# Altium PCB PCB_Hall_Sensor.PcbDoc
Units mil, origin at the board's own origin, x right, y up, seen from the top; angles counter-clockwise.
Board outline 2745 x 2360 mil, 2 copper layers (Top Layer, Bottom Layer); 47 components, 43 nets, 139 pads, 4 vias.
Unrouted connection lines stored in the file: 4.
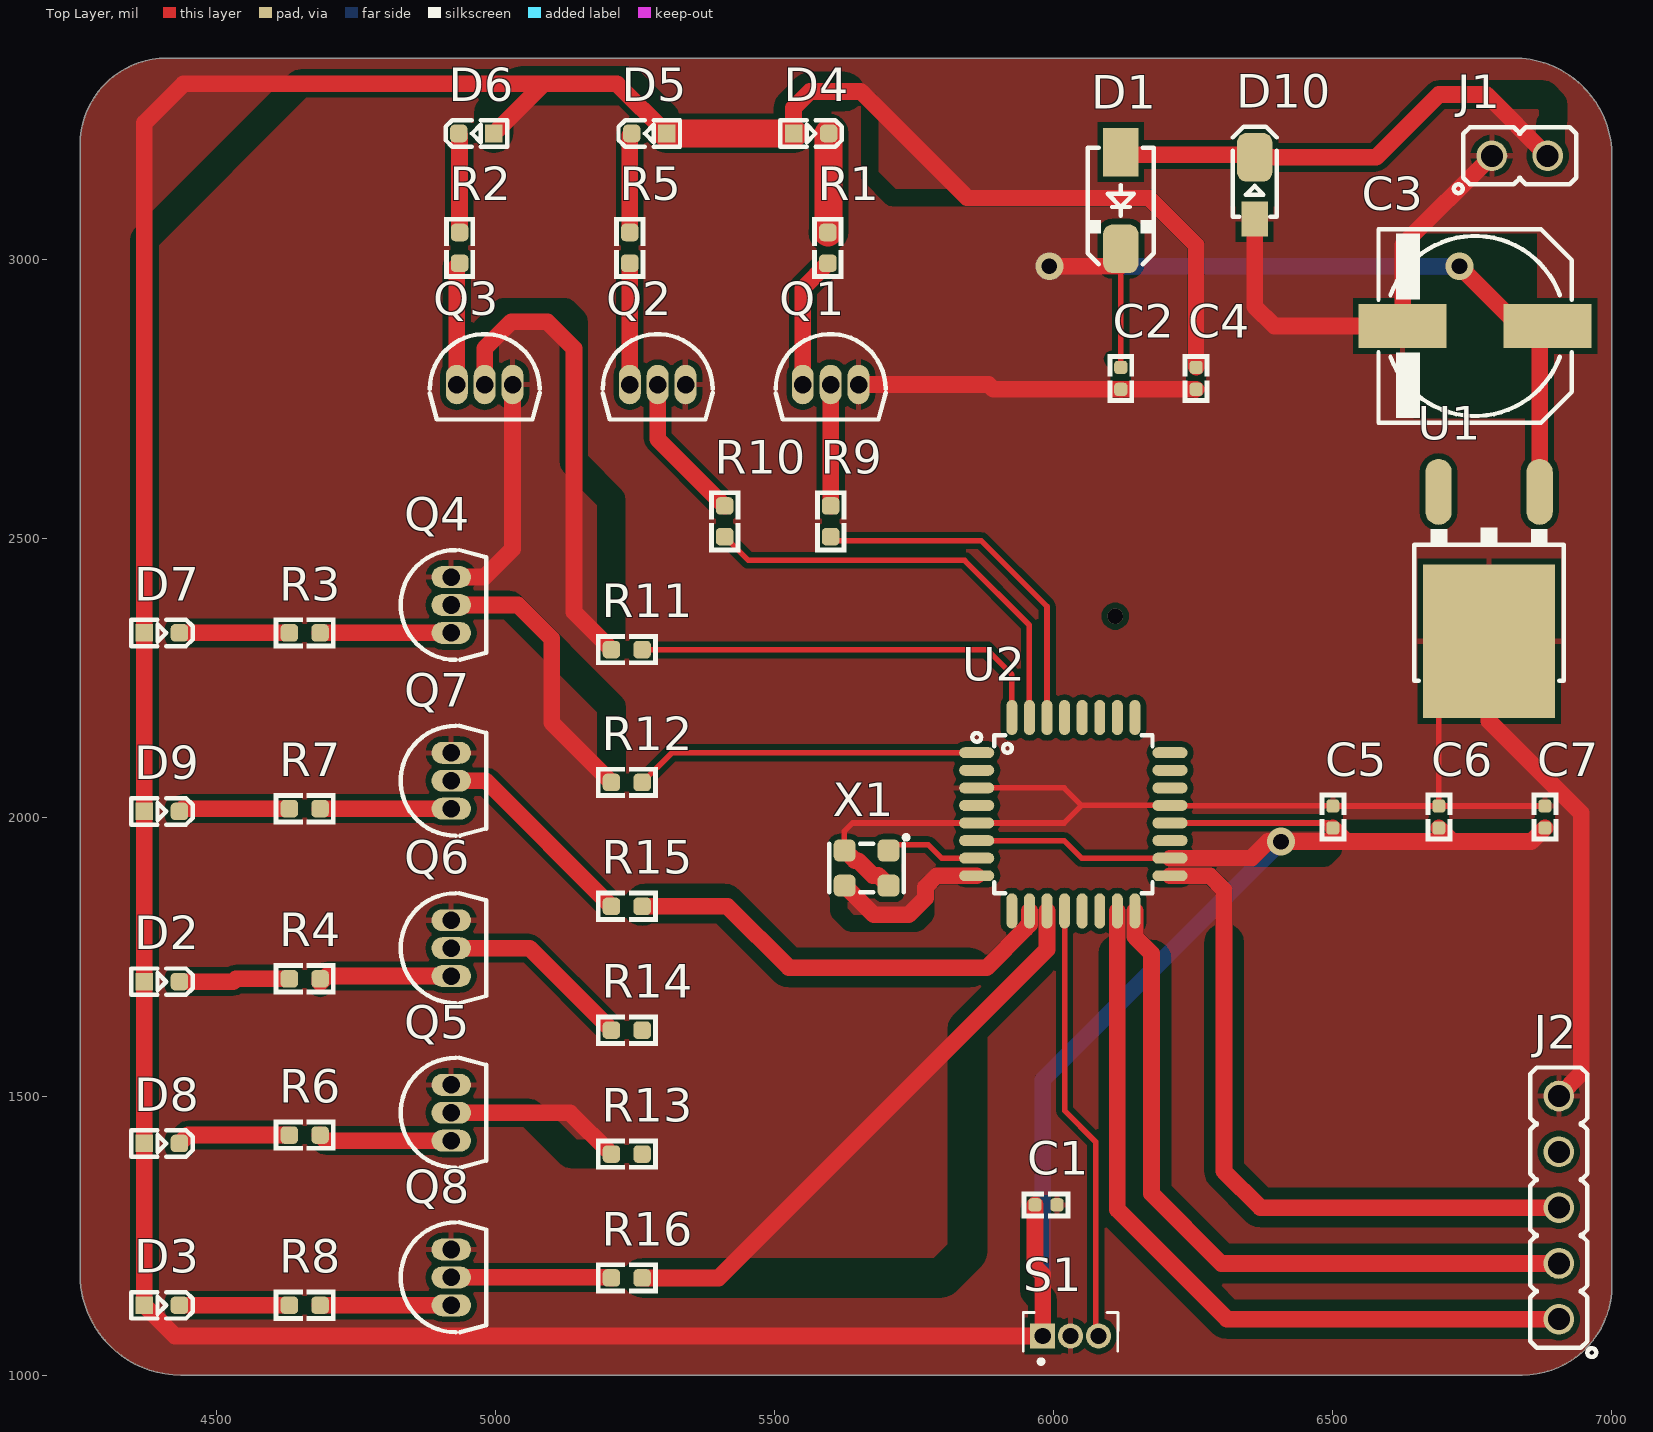
[diagram p0: Top Layer view]
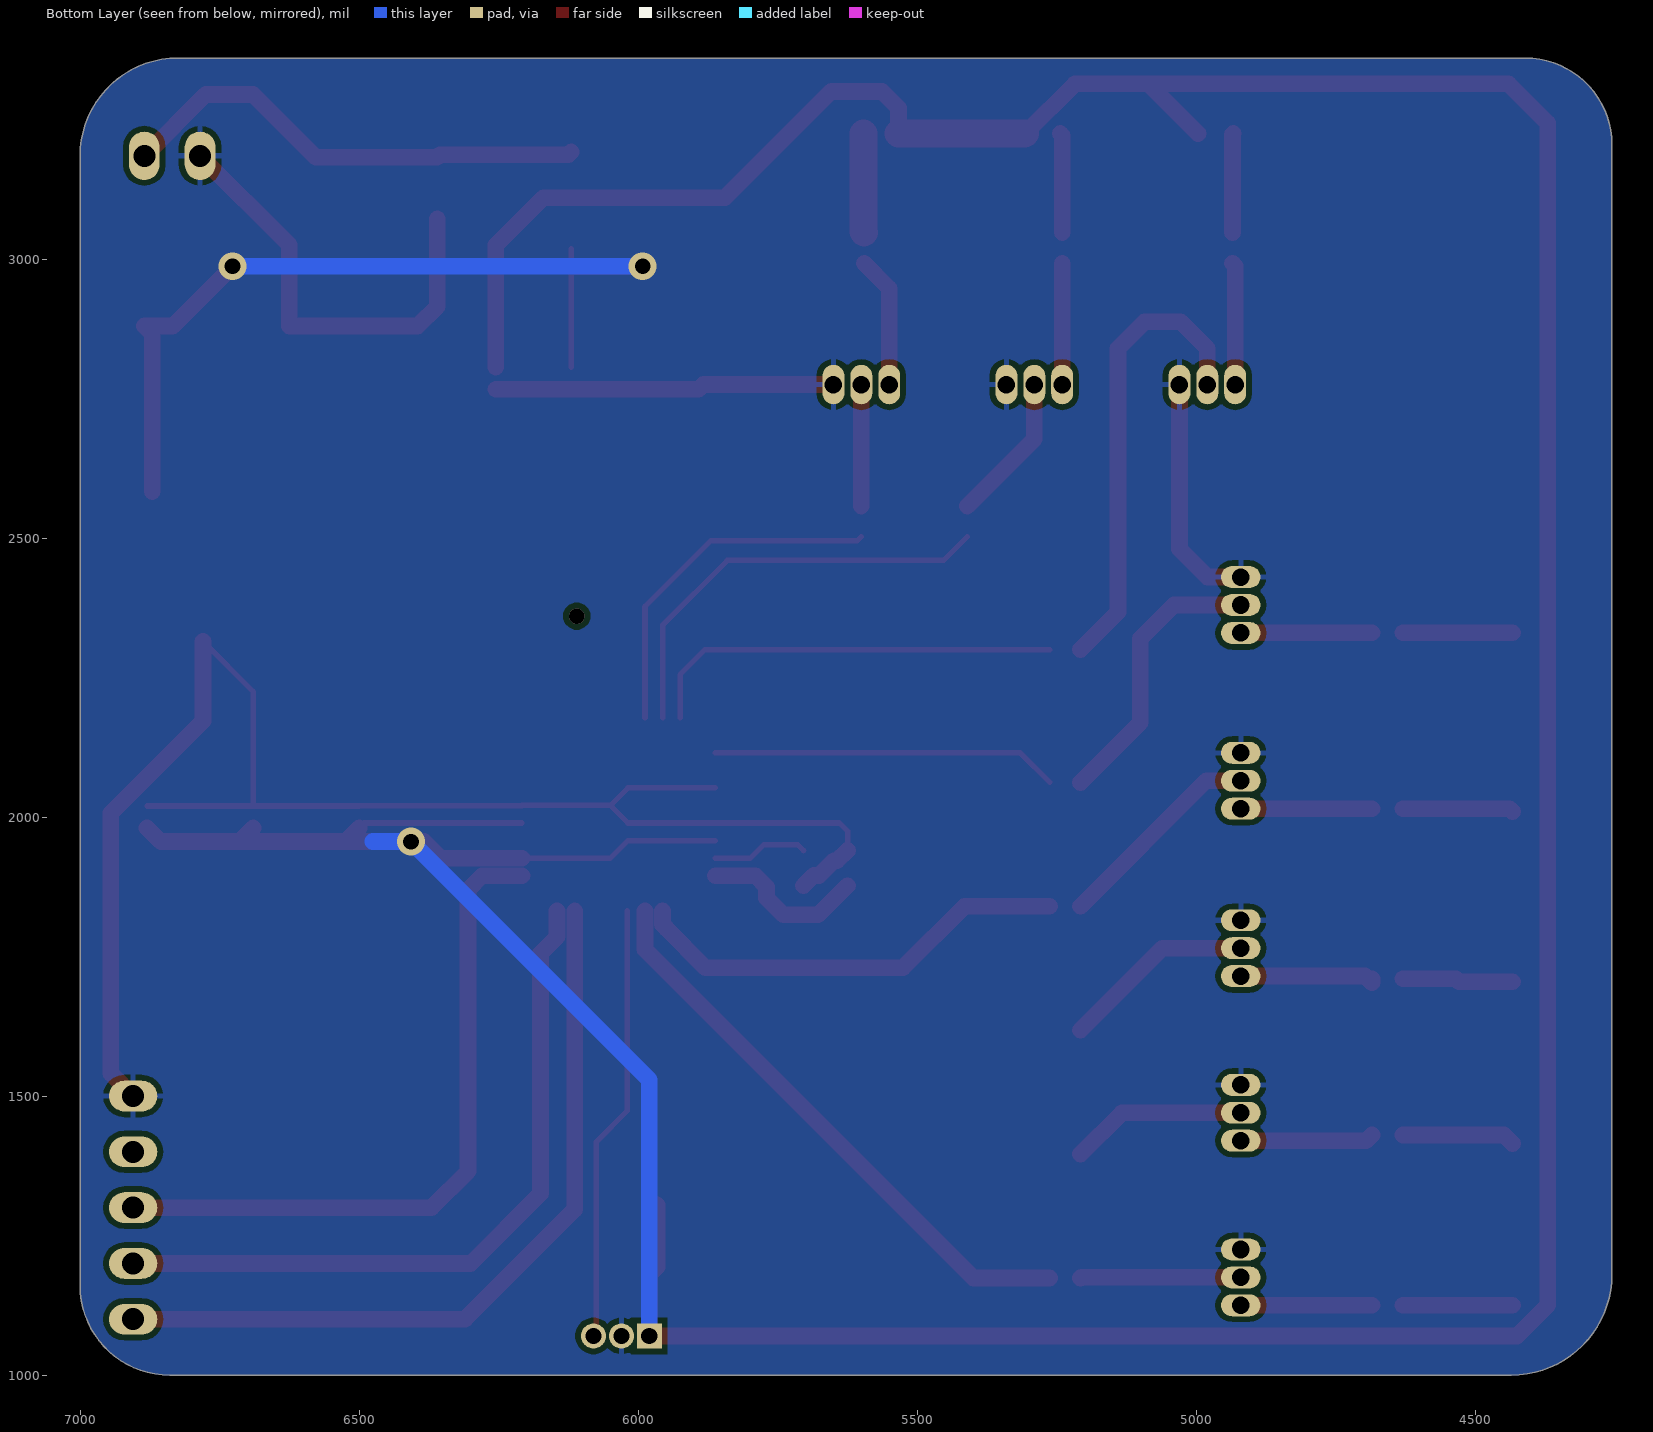
[diagram p1: Bottom Layer view, seen from below]

## Layer stack, top to bottom
Top Solder: solder mask 0.4, Solder Resist, Dk 3.5
Top Layer: signal copper 1.4
Dielectric 1: dielectric 12.6, FR-4, Dk 4.8
Bottom Layer: signal copper 1.4
Bottom Solder: solder mask 0.4, Solder Resist, Dk 3.5

## Board outline
4435,1000 6839.82,1000 ccw(c6840,1160) 7000,1160 7000,3184.74 ccw(c6825,3185) 6825,3360 4410,3360 ccw(c4410,3205) 4255,3205 4255,1180 ccw(c4435,1180)

## Design rules (kind name [scope] priority, off if disabled: settings)
Clearance [All] p1: gap=10 ignorepadtopadclearanceinfootprint=FALSE except(0: Arc-Hole Track-Hole SMDPad-Hole THPad-Hole Via-Hole Fill-Hole Poly-Hole Region-Hole Text-Hole)
PolygonConnect [All] p1: connectstyle=Relief reliefconductorwidth=10 reliefentries=4 polygonreliefangle="90 Angle" airgapwidth=10
RoutingVias [All] p1: holewidth=28 width=50 viastyle="Through Hole" minholewidth=28 minwidth=50 maxholewidth=28 maxwidth=50
SolderMaskExpansion [All] p1: expansion=4 istentingtop=FALSE
Width [All] p1: maxlimit=50 minlimit=10 preferedwidth=30 minimp=50.000000 maximp=50.000000 favimp=50.000000
30 further rules are at their usual default settings.

## Components (designator, comment, footprint, x,y, rotation, side; value= is the part's Value field where it differs from the comment)
C1 "1nF" C0402 5986,1305 r0 top
C2 "1nF" C0402 6120,2786.14 r270 top
C3 "100uF" C_EL_8 6755,2880 r180 top
C4 "1nF" C0402 6255,2786.14 r270 top
C5 "1nF" C0402 6500,2000 r90 top
C6 "1nF" C0402 6690,2000 r90 top
C7 "1nF" C0402 6880,2000 r90 top
D1 "1N4007" D_SMA 6120,3105 r270 top
D2 "LED603RED" LED0603RED 4401.5,1705 r0 top
D3 "LED603RED" LED0603RED 4401.5,1125 r0 top
D4 "LED603RED" LED0603RED 5565,3225 r0 top
D5 "LED603RED" LED0603RED 5275,3225 r180 top
D6 "LED603RED" LED0603RED 4965,3225 r180 top
D7 "LED603RED" LED0603RED 4401.5,2330 r0 top
D8 "LED603RED" LED0603RED 4401.5,1415 r0 top
D9 "LED603RED" LED0603RED 4401.5,2010 r0 top
D10 "ZENER5V6" D_SOD123W 6360,3135 r90 top
J1 "HDRM2" HDR_M_1X2 6835,3185 r0 top
J2 "HDR1X5" HDR_M_1X5 6905,1300 r90 top value=HDRM5
Q1 "BC548" TO92_3 5600,2775 r0 top
Q2 "BC548" TO92_3 5290,2775 r0 top
Q3 "BC548" TO92_3 4980,2775 r0 top
Q4 "BC548" TO92_3 4920,2380 r90 top
Q5 "BC548" TO92_3 4920,1470 r90 top
Q6 "BC548" TO92_3 4920,1765 r90 top
Q7 "BC548" TO92_3 4920,2065 r90 top
Q8 "BC548" TO92_3 4920,1175 r90 top
R1 "10K" R0603 5595,3020 r90 top
R2 "10K" R0603 4935,3020 r90 top
R3 "10K" R0603 4657.44,2330 r180 top
R4 "10K" R0603 4657.44,1710 r180 top
R5 "10K" R0603 5240,3020 r90 top
R6 "10K" R0603 4657.44,1430 r180 top
R7 "10K" R0603 4657.44,2015 r180 top
R8 "10K" R0603 4657.44,1125 r180 top
R9 "330" R0603 5600,2530 r90 top
R10 "10K" R0603 5410,2530 r90 top
R11 "10K" R0603 5234.69,2300 r180 top
R12 "10K" R0603 5234.69,2062 r180 top
R13 "10K" R0603 5234.69,1396 r180 top
R14 "10K" R0603 5234.69,1618 r180 top
R15 "10K" R0603 5234.69,1840 r180 top
R16 "10K" R0603 5234.69,1174 r180 top
S1 "AH3582-P-B" SIP160W38P127L430H495Q3 5980,1070 r90 top
U1 "L78M05CDT" DPAK_3 6780,2582.72 r180 top
U2 "ATMEGA8" QFG80_32 6035,2005 r0 top
X1 "16MHz" XTL_4_2520 5664.37,1908.5 r270 top

## Footprints (in the part's own frame and the unit in brackets; to place one, negate y for a bottom-side part, rotate by r counter-clockwise, add the part's x,y. Pads: shape width x height; smd on the part's side, far side on the other; paste and mask are expansions set on the pad)
C0402 [mm] "CHIP Capacitor, 1.0X0.5mm, 0402"
  rrect50% 0.6x0.6 smd paste-0.05 mask+0.075: 1(-0.5,0) 2(0.5,0)
  silkscreen extent -1.1,-0.6 1.1,0.6, body extent -0.5,-0.26 0.5,0.27, height 0.36
C_EL_8 [mm] "Electrolytic Cap, Size E, Size F, 8.3X10"
  rect 4x2 smd: 1(-3.3,0) 2(3.3,0)
  Top Layer pour cut-out: 2.794,4.191 2.794,-4.191 -2.794,-4.191 -2.794,4.191
  silkscreen extent -4.4,-4.4 4.4,4.4, body extent -4.9,-4.25 4.8,4.25, height 10.3
D_SMA [mm] "SMA Molded Diode, 2-Leads, Body 4.3x2.7mm, SOD-128"
  rect 2.2x1.6 smd paste-0.1: 1(-2.2,0)
  rrect50% 2.2x1.6 smd paste-0.1: 2(2.2,0)
  silkscreen extent -2.4,-1.5 2.9,1.5, body extent -2.75,-1.4 2.75,1.4, height 2.6
D_SOD123W [mm] "PowerDI-123, SOD123, DO-213AA, 1206D"
  rect 1.6x1.2 smd paste-0.1 mask+0.1: 1(-1.6,0)
  rrect50% 2.2x1.6 smd paste-0.1 mask+0.1: 2(1.2,0)
  Top Layer pour cut-out: -1.016,1.1 -1.016,-1.1 1.016,-1.1 1.016,1.1
  silkscreen extent -1.5,-1 2.6,1, body extent -1.95,-0.97 1.95,0.96, height 1
DPAK_3 [mm] "D-PAK (TO-252), 3-Pads, Body 6.2x6.7mm"
  oval 1.2x3 smd: 1(-2.3,0) 3(2.3,0)
  rect 6x7 smd paste-5: 4(0,6.8)
  silkscreen extent -3.4,1.63 3.4,8.6, body extent -3.37,-0.5 3.37,9.6, height 2.37
HDR_M_1X2 [mm] "Connector; Header; 2 Position"
  round 1.4 / inner round 1.4 / far side oval 1.4x2.2 hole 1 mask+0.1: 1(-1.27,0) 2(1.27,0)
  silkscreen extent -3,-1.7 2.57,1.3, body extent -2.54,-1.25 2.44,1.25, height 8.72
HDR_M_1X5 [mm] "Connector; Header; 5 Position"
  round 1.4 / inner round 1.4 / far side oval 1.4x2.2 hole 1 mask+0.1: 1(-5.08,0) 2(-2.54,0) 3(0,0) 4(2.54,0) 5(5.08,0)
  silkscreen extent -6.8,-1.7 6.38,1.3, body extent -6.35,-1.27 6.35,1.27, height 8.54
LED0603RED [mm] "LED SMD 0603, RED"
  rect 0.8x0.8 smd paste-5 mask+0.075: 1(-0.8,0)
  rrect50% 0.8x0.8 smd paste-5 mask+0.075: 2(0.8,0)
  silkscreen extent -1.4,-0.6 1.4,0.6, body extent -0.8,-0.4 0.8,0.4, height 0.5
QFG80_32 [mm] "TQFP32, A32 (Cypress), GP32 (Zarlink), MS-026ABA(JEDEC), 7X7mm, 0.8mm"
  oval 1.6x0.5 smd: 1(-4.4,2.8) 2(-4.4,2) 3(-4.4,1.2) 4(-4.4,0.4) 5(-4.4,-0.4) 6(-4.4,-1.2) 7(-4.4,-2) 8(-4.4,-2.8) 17(4.4,-2.8) 18(4.4,-2) 19(4.4,-1.2) 20(4.4,-0.4) 21(4.4,0.4) 22(4.4,1.2) 23(4.4,2) 24(4.4,2.8)
  oval 0.5x1.6 smd: 9(-2.8,-4.4) 10(-2,-4.4) 11(-1.2,-4.4) 12(-0.4,-4.4) 13(0.4,-4.4) 14(1.2,-4.4) 15(2,-4.4) 16(2.8,-4.4) 25(2.8,4.4) 26(2,4.4) 27(1.2,4.4) 28(0.4,4.4) 29(-0.4,4.4) 30(-1.2,4.4) 31(-2,4.4) 32(-2.8,4.4)
  silkscreen extent -4.6,-3.6 3.6,3.7, body extent -4.5,-4.5 4.5,4.5, height 1.6
R0603 [mm] "CHIP Resistor 1/10 WATT, 1.6x0.8mm, 0603, OPTIMIZED"
  rrect50% 0.8x0.8 smd paste-5 mask+0.075: 1(-0.7,0) 2(0.7,0)
  Top Layer pour cut-out: -0.5,0.4 0.5,0.4 0.5,-0.4 -0.5,-0.4
  silkscreen extent -1.4,-0.7 1.4,0.7, body extent -0.85,-0.4 0.85,0.4, height 0.56
SIP160W38P127L430H495Q3 [mm]
  rect 1.14x1.14 hole 0.74: 1(0,0)
  round 1.14 hole 0.74: 2(0,-1.27) 3(0,-2.54)
  silkscreen extent -1.27,-3.42 1.07,0.88
TO92_3 [mm] "TO-92, SOT54"
  oval 1x1.8 hole 0.8 mask+0.1: 1(-1.27,0) 2(0,0) 3(1.27,0)
  silkscreen extent -2.5,-1.59 2.5,2.3, body extent -2.38,-1.45 2.38,2.18, height 4.82
XTL_4_2520 [mm] "CRYSTAL OSCILATOR 2.5X2.0mm, ABM10, CDFN-4, ASDM"
  rrect50% 1x1 smd: 1(-0.8,1) 2(-0.8,-1) 3(0.8,-1) 4(0.8,1)
  Top Layer pour cut-out: -1.4,1.6 -1.4,-1.6 1.4,-1.6 1.4,1.6
  silkscreen extent -1.5,-1.7 1.1,1.9, body extent -1,-1.25 1,1.25, height 0.8

## Part data
C1 C2 C4 C5 C6 C7: library part CAP_SMD_MLCC, "CAP, MLCC, 1nF, 50V, C0G, 10%, 0402", ASSEMBLY=ASSEMBLY, DESC="CAP, MLCC, 1nF, 50V, C0G, 10%, 0402", MANF=Murata, MANF_P#=MANF_PART#, PARAM="C0G, 10%", PARAM2=50V, PRICE="100= 1$"
C3: library part CAP_SMD_EL, "CAP, THD, ELEC,", ASSEMBLY=ASSEMBLY, DESC=DESCRIPTION, DIST#=MOUSER, MANF=MANF, MANF_P#=MANF_PART#, PARAM=20%, PARAM2=-V, PRICE="10= -$"
D1: library part DIODE_SMD_1N4007, "DIODE, GENERAL PURPOSE, 1000V/1A", ASSEMBLY=ASSEMBLY, DESC=DESCRIPTION, MANF=Kingtronics, MANF_P#=M7, PARAM="1000V VRRM", PARAM2=1A, PRICE=PRICE
D2 D3 D4 D5 D6 D7 D8 D9: library part LED_SMD_0603_RED, "LED, SMD, 0603, RED", ASSEMBLY=ASSEMBLY, DESC=DESCRIPTION, MANF=MANF, MANF_P#=MANF_PART#, PARAM="30mA, 640nm", PARAM2=1.8~2.5V, PRICE=PRICE
D10: library part DIODE_SMD_ZENER_DFLZ5V6, "DIODE, ZENER, 1W, 5.1V", ASSEMBLY=ASSEMBLY, DESC=DESCRIPTION, MANF=Diodes, MANF_P#=DFLZ5V6-7, PARAM=5.6V, PARAM2="1W, 4Ohm, -55~150oC", PRICE=0.5$
J1: library part HDR_M_1X2, "CONN, HEADER, Male, pitch: 2.54mm, 2POS"
J2: library part HDR_M_1X5, "CONN, HEADER, Male, pitch: 2.54mm, 5POS"
Q1 Q2 Q3 Q4 Q5 Q6 Q7 Q8: library part NPN_BC548_TO92, "BJT, NPN, 30v, 0.1A, THD, TO92", MANF=FAIRCHILD, MANF_P#=BC548, PARAM="30v, 0.1A", PARAM2=500mW
R1 R2 R3 R4 R5 R6 R7 R8 R9 R10 R11 R12 R13 R14 R15 R16: library part RES_SMD_0603, "RESISTOR, SMD", ASSEMBLY=ASSEMBLY, DESC=DESCRIPTION, DIST#=MOUSER, MANF=-, MANF_P#=-, PARAM2=1%, PRICE="100= 0.5$"
  R1 R2 R3 R4 R5 R6 R7 R8 R10 R11 R12 R13 R14 R15 R16: PARAM=-W
  R9: PARAM=0.1W
S1: "HALL OMNIPOLAR SWITCH,SIP-3,BULK", Package=None, Availability=Unavailable, MP=AH3582-P-B, PRICE=None
U1: library part VREG_78M05_TO252, "REG, Linear, Fixed, 5v, 0.5A, TO-252", MANF="TI, ST, FAIRCHILD, ON, NJR, ROHM, DIODES", MANF_P#="LM78M05CDT, L7805CDT, MC7805BDT, MC78M05CDT, MC7805BDT, KA7805ERT, NCV7805BDT, BA7805FP, NJM7805DL1A, AS7805ADTR", PARAM="5v, 0.5A", PARAM2=PARAM2
U2: library part ATMEGA8_QFP32, "MCU, AVR, 8-Bit, 8KB, 1KB RAM, 16MHz", DESC="512B EEPROM", MANF=ATMEL/MICROCHIP, MANF_P#=ATMEGA8-16AU, PARAM="8KB, 1KB RAM, 16MHz, -40~85°C", PARAM2=4.5~5.5V, PART#ALT=ATmega8-48-88-168-328, PRICE=2.5$
X1: library part XTL_4_16MHz_2520, "Crystal 16MHz", MANF=ABRACON, MANF_P#=ABM10W-16.0000MHZ-4-D1X-T3, PARAM="10PPM, -40~85oC", PRICE=0.8$

## Via types
v1: diameter 50, hole 28, Top Layer to Bottom Layer, 3 vias
v2: diameter 28, hole 28, Top Layer to Bottom Layer, 1 vias

## Nets (pads, with @x,y where several pads share a name; then routed paths per layer and width w, separated by ;. In a path a pad name is that pad's centre, name@x,y a point inside that pad or via, vN(x,y) a via of type N, cw(c..) or ccw(c..) an arc to the next point about the centre after c; other vN are vias at no path point)
+5: C1.1 C4.1 C5.1 C6.1 C7.1 D2.1 D3.1 D4.1 D5.1 D6.1 D7.1 D8.1 D9.1 S1.1 U1.3 U2.6 U2.18 U2.20 | length 9009.6
  Top Layer w10: U2.6 6018.33,1957.76 6049.82,1926.26 U2.18 ; U2.20 6490.57,1989.25 6499.51,1980.32 C5.1
  Top Layer w30: D6.1 5085.5,3314 ; D5.1 5217.5,3314 5085.5,3314 ; D4.1 5533.5,3270.71 5562.79,3300 5654.14,3300 5844.14,3110 6170,3110 6255,3025 C4.1 ; C1.1 5966.32,1193.68 5980,1180 S1.1 4425,1070 D3.1 D8.1 D2.1 D9.1 D7.1 4370,3244 4440,3314 5085.5,3314 ; U2.18 6354,1926.26 6383.74,1956 v1(6407,1956) 6500,1956 6524.32,1956 ; C5.1 6524.32,1956 ; C6.1 6714.32,1956 ; C7.1 6855.68,1956 6714.32,1956 ; 6524.32,1956 6690,1956 6714.32,1956
  Top Layer w50: D5.1 D4.1
  Bottom Layer w30: S1.1 5980,1529 v1(6407,1956) 6475.68,1956
GND: C1.2 C2.2 C3.2 C4.2 C5.2 C6.2 C7.2 D10.1 J1.1 J2.5 Q1.3 Q2.3 Q3.3 Q4.3 Q5.3 Q6.3 Q7.3 Q8.3 S1.2 U1.4 U2.3 U2.5 U2.21 X1.2 X1.4 | length 4690.6
  Top Layer w10: X1.2 5624.14,1940.86 5624.14,1974.14 5639.25,1989.25 U2.5 6018.33,1989.25 6049.82,2020.75 ; U2.3 6018.33,2052.24 6049.82,2020.75 ; U1.4 6690,2225 C6.2 ; C7.2 C6.2 ; 6049.82,2020.75 U2.21 6208.76,2020.22 6499.47,2020.22 C5.2 C6.2
  Top Layer w30: Q4.3 4980,2430 5030,2480 Q3.3 ; X1.2 5643.31,1921.69 5649.27,1921.69 5675.65,1895.31 5685.43,1895.31 X1.4 ; Q1.3 5882.89,2775 5891.44,2766.46 C2.2 C4.2 ; D10.1 6360,2915 6395,2880 C3.2 6625.08,3025.08 J1.1 ; U1.4 6780,2172 6945,2007 6945,1540 J2.5
NetC2_1: C2.1 C3.1 D1.2 U1.1 | length 1581
  Top Layer w10: C2.1 6120,2987 D1.2
  Top Layer w30: v1(5992,2987) D1.2@6120,2987 ; v1(6727,2987) 6834,2880 C3.1 6870.55,2865.63 U1.1
  Bottom Layer w30: v1(5992,2987) v1(6727,2987)
NetD1_1: D1.1 D10.2 J1.2 | length 861.1
  Top Layer w30: D1.1 6124.69,3186.93 6355.31,3186.93 D10.2 6577.24,3182.24 6690,3295 6775,3295 J1.2
NetD2_2: D2.2 R4.2 | length 199
  Top Layer w30: D2.2 4529.31,1705 4534.31,1710 R4.2
NetD3_2: D3.2 R8.2 | length 196.9
  Top Layer w30: D3.2 R8.2
NetD4_2: D4.2 R1.2 | length 178.1
  Top Layer w50: R1.2 5596.5,3049.06 D4.2
NetD5_2: D5.2 R5.2 | length 178.9
  Top Layer w30: R5.2 5240,3221.5 D5.2
NetD6_2: D6.2 R2.2 | length 178.1
  Top Layer w30: D6.2 4935,3223.5 R2.2
NetD7_2: D7.2 R3.2 | length 196.9
  Top Layer w30: D7.2 R3.2
NetD8_2: D8.2 R6.2 | length 203.1
  Top Layer w30: D8.2 4447.99,1430 R6.2
NetD9_2: D9.2 R7.2 | length 199
  Top Layer w30: D9.2 4437.99,2015 R7.2
NetJ2_1: J2.1 U2.15 | length 1408.1
  Top Layer w30: U2.15 6113.74,1296.26 6310,1100 J2.1
NetJ2_2: J2.2 U2.16 | length 1300.9
  Top Layer w30: U2.16 6145.24,1785.28 6175,1755.51 6175,1325 6300,1200 J2.2
NetJ2_3: J2.3 U2.17 | length 1238.7
  Top Layer w30: U2.17 6279.76,1894.76 6305,1869.53 6305,1365 6370,1300 J2.3
NetJ2_4: J2.4 U2.29
NetQ1_1: Q1.1 R1.1 | length 236.1
  Top Layer w30: Q1.1 5550,2947.44 R1.1
NetQ1_2: Q1.2 R9.2 | length 217.4
  Top Layer w30: R9.2 Q1.2
NetQ2_1: Q2.1 R5.1 | length 217.4
  Top Layer w30: Q2.1 R5.1
NetQ2_2: Q2.2 R10.2 | length 267.1
  Top Layer w30: Q2.2 5290,2677.56 R10.2
NetQ3_1: Q3.1 R2.1 | length 219.5
  Top Layer w30: Q3.1 4930,2987.44 R2.1
NetQ3_2: Q3.2 R11.2 | length 832.1
  Top Layer w30: Q3.2 4980,2840 5027.43,2887.43 5092.57,2887.43 5140,2840 5140,2367.13 R11.2
NetQ4_1: Q4.1 R3.1 | length 235
  Top Layer w30: R3.1 Q4.1
NetQ4_2: Q4.2 R12.2 | length 507.2
  Top Layer w30: Q4.2 5040,2380 5100,2320 5100,2169.13 R12.2
NetQ5_1: Q5.1 R6.1 | length 239.1
  Top Layer w30: R6.1 4695,1420 Q5.1
NetQ5_2: Q5.2 R13.2 | length 317.8
  Top Layer w30: Q5.2 5133.13,1470 R13.2
NetQ6_1: Q6.1 R4.1 | length 247.1
  Top Layer w30: R4.1 4685,1702.88 4697.12,1715 Q6.1
NetQ6_2: Q6.2 R14.2 | length 348
  Top Layer w30: Q6.2 5060.13,1765 R14.2
NetQ7_1: Q7.1 R7.1 | length 235
  Top Layer w30: R7.1 Q7.1
NetQ7_2: Q7.2 R15.2 | length 380.3
  Top Layer w30: Q7.2 4982.13,2065 R15.2
NetQ8_1: Q8.1 R8.1 | length 235
  Top Layer w30: R8.1 Q8.1
NetQ8_2: Q8.2 R16.2 | length 287.5
  Top Layer w30: Q8.2 5206.13,1175 R16.2
NetR9_1: R9.1 U2.30 | length 638.6
  Top Layer w10: R9.1 5607.44,2495 5870,2495 5987.76,2377.24 U2.30
NetR10_1: R10.1 U2.31 | length 777.5
  Top Layer w10: R10.1 5452.44,2460 5840,2460 5956.26,2343.74 U2.31
NetR11_1: R11.1 U2.32 | length 758.1
  Top Layer w10: R11.1 5880,2300 5924.76,2255.24 U2.32
NetR12_1: R12.1 U2.1 | length 621.6
  Top Layer w10: R12.1 5315.48,2115.24 U2.1
NetR13_1: R13.1 U2.2
NetR14_1: R14.1 U2.9
NetR15_1: R15.1 U2.10 | length 796.5
  Top Layer w30: R15.1 5415,1840 5525,1730 5879.78,1730 5949.61,1799.83 5949.61,1800.84 5956.26,1807.5 U2.10
NetR16_1: R16.1 U2.11 | length 1038.4
  Top Layer w30: R16.1 5399,1174 5987.76,1762.76 U2.11
NetS1_3: S1.3 U2.12 | length 786.9
  Top Layer w10: U2.12 6019.25,1473.84 6075,1418.09 6075,1075 S1.3
XTAL1: U2.7 X1.1 | length 172
  Top Layer w10: X1.1 5713.74,1950 5775,1950 5798.74,1926.26 U2.7
XTAL2: U2.8 X1.3 | length 298.9
  Top Layer w30: X1.3 5677.01,1825 5740,1825 5770,1855 5770,1875 5789.76,1894.76 U2.8
pads on no net: U2.4 U2.13 U2.14 U2.19 U2.22 U2.23 U2.24 U2.25 U2.26 U2.27 U2.28
copper on no net:
  other v2: 6110,2360

## Polygon pours and split planes (outlines as drawn)
GND on Top Layer "GND_L01_P000" (solid, pour order 0): 4435,1000 6839.82,1000 ccw(c6840,1160) 7000,1160 7000,3184.74 ccw(c6825,3185) 6825,3360 4410,3360 ccw(c4410,3205) 4255,3205 4255,1180 ccw(c4435,1180)
GND on Bottom Layer "GND_L02_P001" (solid, pour order 1): 4435,1000 6839.82,1000 ccw(c6840,1160) 7000,1160 7000,3184.74 ccw(c6825,3185) 6825,3360 4410,3360 ccw(c4410,3205) 4255,3205 4255,1180 ccw(c4435,1180)